# Altium PCB PCBenDIM.PcbDoc (part 2 of 3)
Units mil, origin at the board's own origin, x right, y up, seen from the top; angles counter-clockwise.
Board outline 3937.01 x 3149.61 mil, 2 copper layers (Top Layer, Bottom Layer); 105 components, 104 nets, 450 pads, 157 vias.
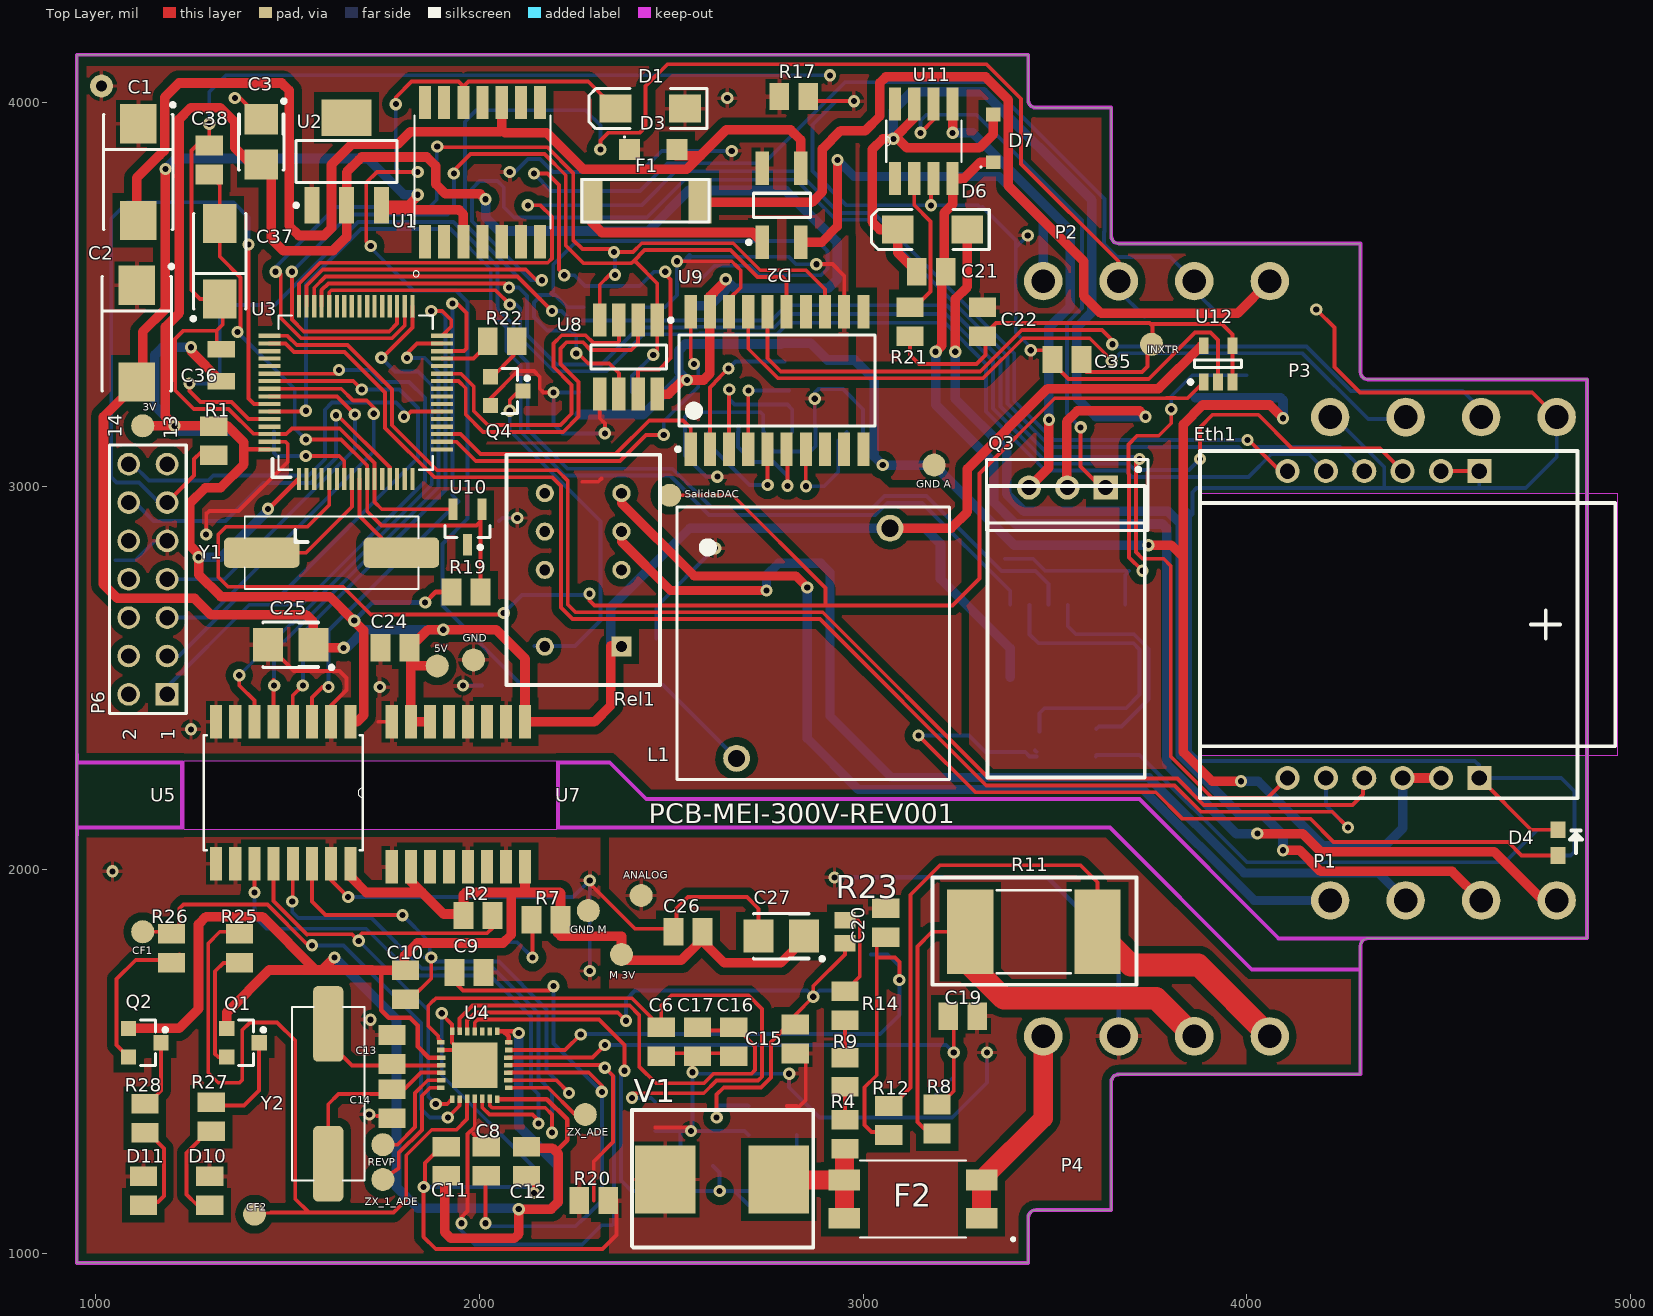
[diagram p0: Top Layer view]

## Via types
v1: diameter 32, hole 16, Top Layer to Bottom Layer, 157 vias

## Nets (pads, with @x,y where several pads share a name; then routed paths per layer and width w, separated by ;. In a path a pad name is that pad's centre, name@x,y a point inside that pad or via, vN(x,y) a via of type N, cw(c..) or ccw(c..) an arc to the next point about the centre after c; other vN are vias at no path point) (continued)
M_V3V3: (continued)
  Top Layer w25: Q2.3@1085.24,1586.61 1085.92,1587.3 1197.19,1587.3 1197.88,1586.61 1216.53,1586.61 1267.31,1637.38 1267.31,1857.86 1287.4,1877.95 1433.86,1877.95 1572.84,1738.98 ; Q1.3@1341.14,1586.61 1341.14,1628.55 1451.57,1738.98 1572.84,1738.98 ; v1(1622.05,1771.65) 1589.37,1738.98 ; U5.16@1663.19,2015.79 1663.19,1982.48 1704.72,1940.94 1850.39,1940.94 ; C10.2@1807.09,1738.58 1744.09,1738.58 1720.87,1738.58 1720.47,1738.98 1589.37,1738.98 ; C10.2@1816.54,1730.71 1803.96,1743.28 1803.96,1775.59 1837.64,1809.27 1917.57,1809.27 1917.65,1809.19 2061.16,1809.19 2082.68,1830.71 2082.68,1940.94 ; U7.10@1818.9,2005.91 1818.9,1972.44 1850.39,1940.94 ; C11.1@1913.39,1202.36 1909.45,1198.42 1909.45,1055.12 1925.2,1039.37 2090.55,1039.37 2102.36,1051.18 v1(2102.36,1115.49) 2186.35,1115.49 2204.72,1133.86 2204.72,1259.84 2189.92,1274.65 2125.35,1274.65 C12.2@2122.05,1277.95 C12.2@2119.78,1277.95 ; 1958.27,1934.65 1958.27,1884.84 1906.5,1884.84 1850.39,1940.94 ; 1964.57,1940.94 2082.68,1940.94 ; 2118.5,1941.34 U7.16@2118.5,2007.87 ; R7.2@2202.76,1836.61 2212.36,1827.01 2370.08,1827.01 pad.000@2370.08,1779.53 2370.08,1767.72 2374.02,1763.78 2525.59,1763.78 2572.83,1811.02 2572.83,1822.83 2637.8,1757.87 2785.43,1757.87 2845.67,1818.11 C27.1@2845.67,1827.17 ; R7.2@2211.02,1870.08 2211.02,1938.58 2208.66,1940.94 2118.11,1940.94 2082.68,1940.94 ; 1572.84,1738.98 1589.37,1738.98
  Bottom Layer w25: v1(1622.05,1771.65) 1783.46,1610.24 1783.46,1173.23 1838.95,1117.74 2094.86,1117.74 2097.11,1115.49 v1(2102.36,1115.49) 2186.35,1115.49 2204.04,1133.18 2204.04,1229.29 2203.78,1229.29 2102.36,1330.71 v1(2102.36,1574.8)